# EAGLE board Headphone-Amplifier-ClassAB-Stereo-alt3 (EAGLE 7.6.0)
4x4 - Three Transistor Headphone Amplifier - Class AB http://www.electronics-diy.com/4x4.php
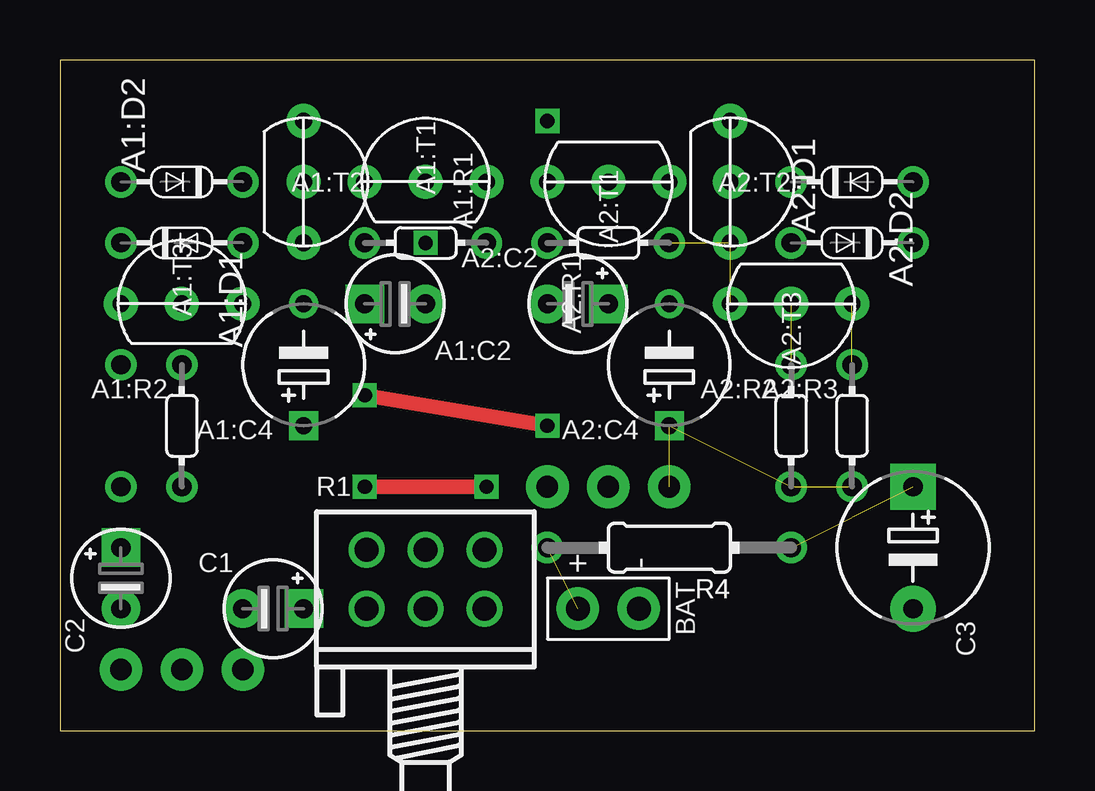
[diagram p0: board, top side]
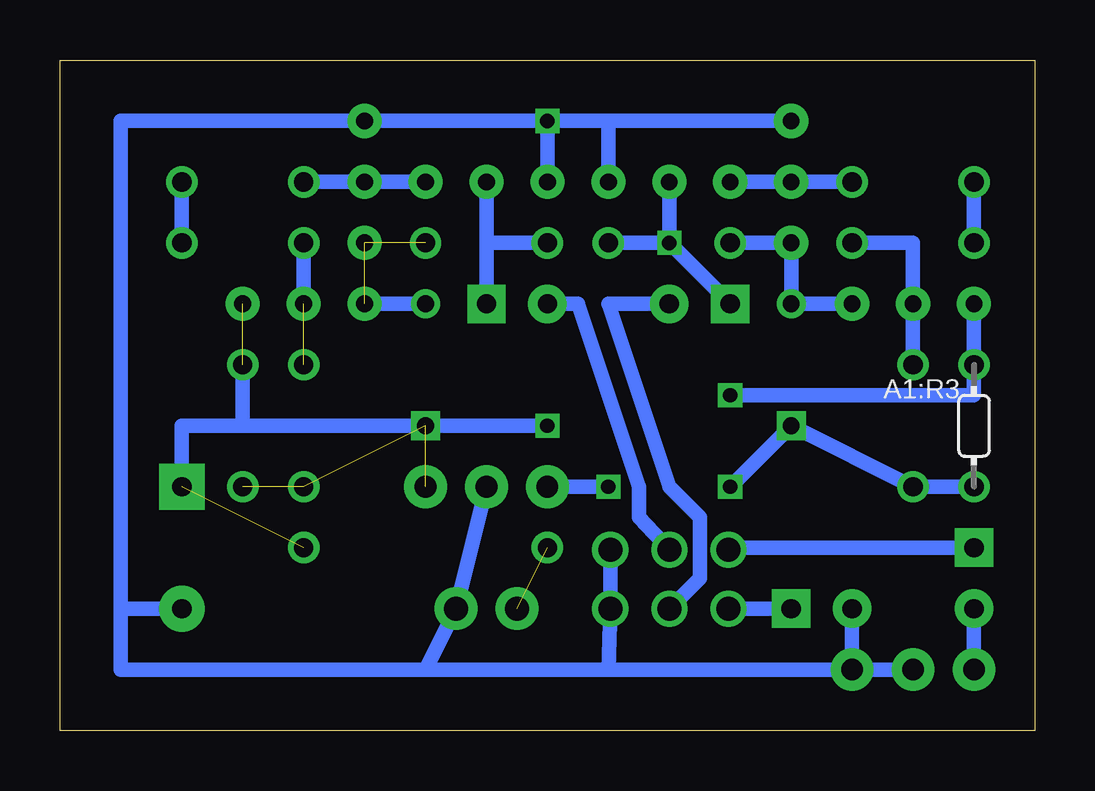
[diagram p1: board, bottom side, seen from below]

Size 40.64 x 27.94 mm. Coordinates in mm from the lower left corner, seen from the top.
Outline: 0,0 40.64,0 40.64,27.94 0,27.94 0,0
Copper layers (1*16): Top 0.035mm / dielectric 1.5mm / Bottom 0.035mm
Design rules "default": minimum track width 10mil, minimum drill 24mil, track to track 8mil, track to pad 8mil, pad to pad 8mil, via to via 8mil, smd to smd 8mil, copper to edge 40mil, drill to drill 8mil, minimum pad ring 10mil, minimum via ring 8mil, stop-mask expansion 4mil, vias tented up to drill 0mil, thermal gap 10mil

## Footprints (pad centres in the part's own frame; a part is rotated, then mirrored left to right if it is on the bottom)
E2,5-4 = drill 0.8 pad 1.6 square: + 0,1.27 | drill 0.8 pad 1.6: - 0,-1.27
E5-5/V = drill 0.7 square: + 0,2.54 | drill 0.7: - 0,-2.54
DO34-5V = drill 0.8: A 0,2.54; C 0,-2.54
0202/5-V = drill 0.8: 1 0,2.54; 2 0,-2.54
TO92-CBE = drill 0.7 pad 1.422: B 0,0; C 0,2.54; E 0,-2.54
SPAD+- = drill 1 pad 1.778: 1 0,-1.27; 2 0,1.27
E5-6 = drill 0.8 pad 1.905 square: + -2.54,0 | drill 0.8 pad 1.905: - 2.54,0
SPAD-3 = drill 0.9 pad 1.778: 1 -2.54,0; 2 0,0; 3 2.54,0
POT-STEREO-2X3 = drill 1: 1-A -2.46,-2.54; 1-E 2.46,-2.54; 1-S 0,-2.54; 2-A -2.46,-0.08; 2-E 2.46,-0.08; 2-S 0,-0.08
0204/10 = drill 0.8: 1 -5.08,0; 2 5.08,0

## Placement (x,y rotation side)
A1:C2  4.7uF  [E2,5-4]  13.97,17.78 90 top
A1:C4  220uF  [E5-5/V]  10.16,15.24 180 top
A1:D1  1N4148  [DO34-5V]  5.08,20.32 270 top
A1:D2  1N4148  [DO34-5V]  5.08,22.86 90 top
A1:R1  100k  [0202/5-V]  15.24,20.32 270 top
A1:R2  330  [0202/5-V]  5.08,12.7 0 top
A1:R3  100  [0202/5-V]  2.54,12.7 0 bottom
A1:T1  BC547  [TO92-CBE]  15.24,22.86 90 top
A1:T2  BC557  [TO92-CBE]  10.16,22.86 0 top
A1:T3  BC547  [TO92-CBE]  5.08,17.78 90 top
A2:C2  4.7uF  [E2,5-4]  21.59,17.78 270 top
A2:C4  220uF  [E5-5/V]  25.4,15.24 180 top
A2:D1  1N4148  [DO34-5V]  33.02,20.32 90 top
A2:D2  1N4148  [DO34-5V]  33.02,22.86 270 top
A2:R1  100k  [0202/5-V]  22.86,20.32 90 top
A2:R2  330  [0202/5-V]  30.48,12.7 0 top
A2:R3  100  [0202/5-V]  33.02,12.7 0 top
A2:T1  BC547  [TO92-CBE]  22.86,22.86 270 top
A2:T2  BC557  [TO92-CBE]  27.94,22.86 0 top
A2:T3  BC547  [TO92-CBE]  30.48,17.78 270 top
BAT  SPAD+-+-  [SPAD+-]  22.86,5.08 90 top
C1  4.7uF  [E2,5-4]  8.89,5.08 270 top
C2  4.7uF  [E2,5-4]  2.54,6.35 0 top
C3  100-1000uF  [E5-6]  35.56,7.62 270 top
IN  SAUDIO  [SPAD-3]  5.08,2.54 180 top
OUT  SAUDIO  [SPAD-3]  22.86,10.16 0 top
R1  POT-STEREO  [POT-STEREO-2X3]  15.24,7.62 0 top
R4  22  [0204/10]  25.4,7.62 180 top

## Library data of the parts
A1:C2 A1:C4 A2:C2 A2:C4 C1-C3 = c
A1:D1 A1:D2 A2:D1 A2:D2 = d
A1:R1-A1:R3 A2:R1-A2:R3 R1 R4 = r
A1:T1-A1:T3 A2:T1-A2:T3 = t
BAT IN OUT = pad

## Nets
+3V: BAT.2 R4.2
A1:N$1: A1:D1.A A1:R2.1 A1:T3.B
A1:N$2: A1:D2.C A1:T1.C A1:T2.B
A1:N$3: A1:D1.C A1:D2.A
A1:N$4: A1:C4.- A1:R1.2 A1:T2.E A1:T3.E
A1:N$7: A1:C2.+ A1:R1.1 A1:T1.B
A2:N$1: A2:D1.A A2:R2.1 A2:T3.B
A2:N$2: A2:D2.C A2:T1.C A2:T2.B
A2:N$3: A2:D1.C A2:D2.A
A2:N$4: A2:C4.- A2:R1.2 A2:T2.E A2:T3.E
A2:N$7: A2:C2.+ A2:R1.1 A2:T1.B
GND: A1:T1.E A1:T2.C A2:T1.E A2:T2.C BAT.1 C3.- IN.2 OUT.2 R1.1-E R1.2-E
N$1: A1:R3.1 A1:T3.C A2:R3.1 A2:T3.C C3.+ R4.1
N$2: A1:C4.+ A1:R2.2 A1:R3.2 OUT.1
N$3: C2.- IN.3
N$4: C2.+ R1.2-A
N$5: C1.+ R1.1-A
N$6: A1:C2.- R1.1-S
N$7: A2:C2.- R1.2-S
N$8: A2:C4.+ A2:R2.2 A2:R3.2 OUT.3
N$10: C1.- IN.1

## Tracks (layer width: path | path; a pad name or v marks a point on that pad's centre or on a via)
+3V  (1 unrouted)
A1:N$1
  Bottom 0.61: A1:R2.1 A1:T3.B 5.08,20.32 A1:D1.A
A1:N$2
  Bottom 0.61: A1:T1.C A1:T2.B A1:D2.C
A1:N$3
  Bottom 0.61: A1:D1.C A1:D2.A
A1:N$4
  Bottom 0.61: A1:R1.2 A1:T2.E A1:C4.- A1:T3.E
A1:N$7  (via drill 0.6)
  Bottom 0.61: A1:T1.B v15.24,20.32 | A1:R1.1 v15.24,20.32 | v15.24,20.32 A1:C2.+
A2:N$1  (1 unrouted)
  Bottom 0.61: A2:D1.A A2:T3.B
A2:N$2
  Bottom 0.61: A2:D2.C A2:T1.C A2:T2.B
A2:N$3
  Bottom 0.61: A2:D2.A A2:D1.C
A2:N$4  (2 unrouted)
  Bottom 0.61: A2:T3.E A2:C4.-
A2:N$7
  Bottom 0.61: 22.86,20.32 A2:T1.B | 22.86,20.32 A2:R1.1 22.86,20.32 | 22.86,20.32 22.86,19.05 A2:C2.+
GND  (via drill 0.6)
  Bottom 0.61: 38.1,5.08 38.1,25.4 A2:T2.C v20.32,25.4 | A2:T1.E v20.32,25.4 | v20.32,25.4 A1:T2.C 17.78,25.4 A1:T1.E | IN.2 17.78,2.54 | R1.2-E R1.1-E 17.78,2.54 | 17.78,2.54 25.4,2.54 | 25.4,2.54 BAT.1 OUT.2 | 25.4,2.54 38.1,2.54 38.1,5.08 | 38.1,5.08 C3.-
N$1  (via drill 0.6)  (2 unrouted)
  Top 0.61: v12.7,13.97 v20.32,12.7
  Bottom 0.61: A1:T3.C A1:R3.1 2.54,13.97 v12.7,13.97 | v20.32,12.7 33.02,12.7 | 33.02,12.7 A2:R3.1 | C3.+ 35.56,12.7 33.02,12.7
N$2  (via drill 0.6)
  Top 0.61: v12.7,10.16 v17.78,10.16
  Bottom 0.61: A1:R3.2 A1:R2.2 A1:C4.+ v12.7,10.16 | v17.78,10.16 OUT.1
  other vias: 10.16,12.7
N$3
  Bottom 0.61: C2.- IN.3
N$4
  Bottom 0.61: C2.+ 12.78,7.62 R1.2-A
N$5
  Bottom 0.61: R1.1-A C1.+
N$6
  Bottom 0.61: R1.1-S 13.97,6.35 13.97,8.89 15.24,10.16 17.78,17.78 A1:C2.-
N$7
  Bottom 0.61: A2:C2.- 19.05,17.78 16.51,10.16 16.51,8.89 R1.2-S
N$8  (3 unrouted)
N$10
  Bottom 0.61: C1.- IN.1